# Altium PCB etapa_1_v2.PcbDoc (part 2 of 2)
Units mil, origin at the board's own origin, x right, y up, seen from the top; angles counter-clockwise.
Board outline 2047.24 x 2047.24 mil, 6 copper layers (Top Layer, Pot_Gnd, X, Y, Ground, Bottom Layer); 286 components, 155 nets, 796 pads, 177 vias.
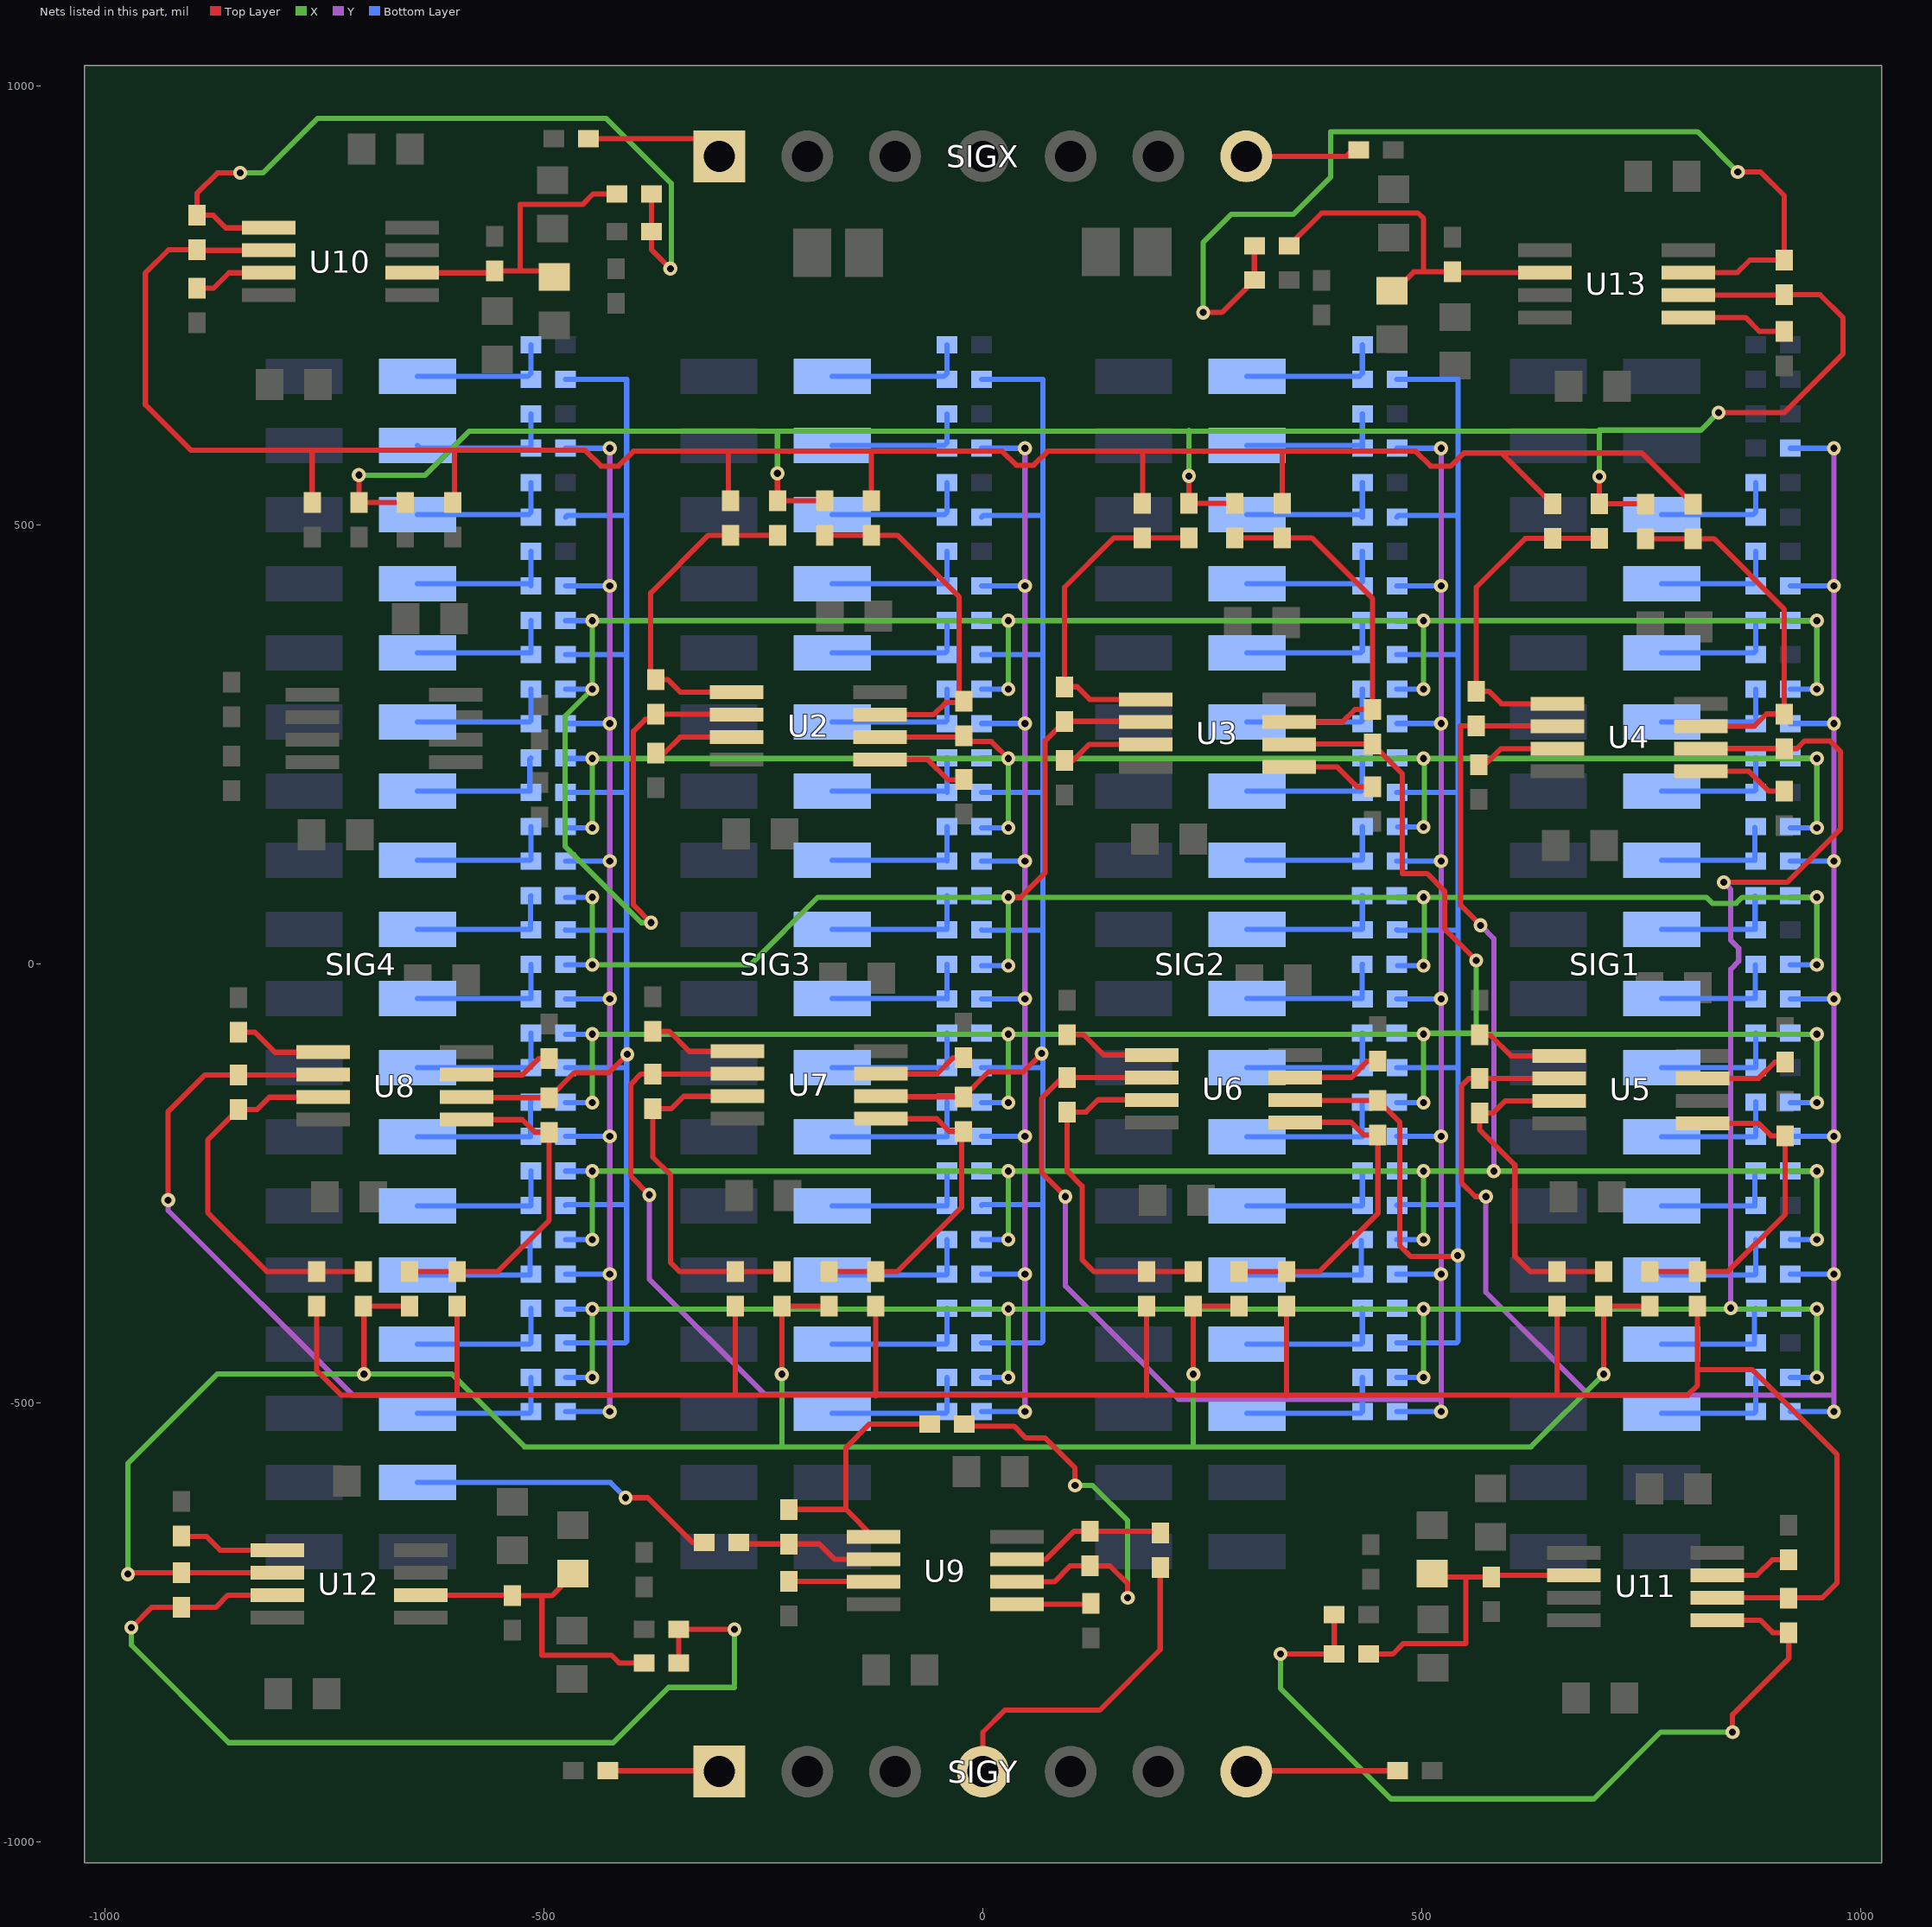
[diagram p6: the nets of this part, all layers, seen from the top]

## Via types
v1: diameter 16, hole 8, Top Layer to Bottom Layer, 177 vias

## Nets (pads, with @x,y where several pads share a name; then routed paths per layer and width w, separated by ;. In a path a pad name is that pad's centre, name@x,y a point inside that pad or via, vN(x,y) a via of type N, cw(c..) or ccw(c..) an arc to the next point about the centre after c; other vN are vias at no path point) (continued)
NetR2y_1: R2y.1 R10.1 R10y.1 R18y.1 R26y.1 R34y.1 R42y.1 R50y.1 R58y.1 U5.6 | length 2298
  Top Layer w6: R10.1@560,-130.31 553.69,-130.31 545.16,-138.84 545.16,-249.16 561,-265 v1(573,-265) ; R10.1@561,-130.31 R10.1@566,-130.31 656.2,-130.31 U5.6@656.31,-130.2
  Y w6: v1(573,-265) 573,-374 690,-491 968.58,-491 ; v1@968.58,-509.95 v1(969.58,-510) 969.58,-491 ; v1@968.58,-353.24 v1(969.58,-353.23) ; v1@968.58,-196.45 v1(969.58,-196.45) ; v1@968.58,-39.68 v1(969.58,-39.68) ; v1@968.58,117.1 v1(969.58,117.1) ; v1@968.58,273.87 v1(969.58,273.87) ; v1@968.58,430.64 v1(969.58,430.64) ; v1@968.58,587.42 v1(969.58,587.42) v1(969.58,430.64) ; 969.58,-489 v1(969.58,-353.23) ; v1(969.58,-353.23) v1(969.58,-196.45) ; v1(969.58,-196.45) v1(969.58,-39.68) ; v1(969.58,-39.68) v1(969.58,117.1) ; v1(969.58,117.1) v1(969.58,273.87) ; v1(969.58,273.87) v1(969.58,430.64)
  Bottom Layer w6: R58y.1@919.69,-510 v1@967.58,-510 ; R50y.1@919.69,-353.23 v1@967.58,-353.23 ; R42y.1@919.69,-196.45 v1@967.58,-196.45 ; R34y.1@919.69,-39.68 v1@967.58,-39.68 ; R26y.1@919.69,117.1 v1@967.58,117.1 ; R18y.1@919.69,273.87 v1@967.58,273.87 ; R10y.1@919.69,430.64 v1@967.58,430.64 ; R2y.1@919.69,587.42 v1@967.58,587.42
NetR3_0_2: R3_0.2 U2.3 | length 100
  Top Layer w6: R3_0.2@-373,239.68 -363.32,239.68 -344.8,258.2 U2.3@-280.69,258.2
NetR3_1: R3.1 R17x.1 R18x.1 R19x.1 R20x.1 R21x.1 R22x.1 R23x.1 R24x.1 U2.2 | length 2617.1
  Top Layer w6: v1(-378,47) -398,67 -398,265 -384.69,278.31 R3.1@-378,278.31 ; R3.1@-373,284.31 -281.21,284.31 U2.2@-280.69,283.8
  X w6: v1@-380.65,47 -389,47 -476,134 -476,282 v1(-445,313) v1(-445,391) v1(29,391) ; v1(29,313) v1(29,391) ; v1(502,313) v1(502,391) ; v1(950,313) v1(950,391) v1(502,391) ; v1(29,391) v1(502,391)
  Bottom Layer w6: R24x.1@-475.31,313.06 v1(-445,313) ; R23x.1@-475.31,391 v1(-445,391) ; R22x.1@-1.31,313.06 v1(29,313) ; R21x.1@-1.31,391 v1(29,391) ; R20x.1@471.69,313.06 v1(502,313) ; R19x.1@471.69,391 v1(502,391) ; R18x.1@919.68,313.06 v1(950,313) ; R17x.1@919.68,391 v1(950,391)
NetR3_2: R3.2 RX3A.2 RX3B.2 U2.1 | length 375.1
  Top Layer w6: R3.2@-378.31,317.3 -378.31,422.69 -312.69,488.31 RX3A.2@-287.2,488.31 RX3B.2@-234,488.31 ; R3.2@-373,323.69 -358.69,323.69 -344.39,309.39 U2.1@-280.69,309.39
NetR3x_2: R3x.2 R3y.2 SIG2.1 | length 165.3
  Bottom Layer w6: SIG2.1@300.72,669.29 428.83,669.29 432.31,672.78 R3x.2@432.31,705
NetR3y_1: R3y.1 R11.1 R11y.1 R19y.1 R27y.1 R35y.1 R43y.1 R51y.1 R59y.1 U6.2 | length 1987.3
  Top Layer w6: U6.2@355.69,-154.8 356.21,-155.31 R11.1@448,-155.31 ; R11.1@450,-155.31 475,-180.31 475,-321 487,-333 540,-333 v1(541,-332)
  Bottom Layer w6: R59y.1@471.69,-431.61 539.39,-431.61 541.2,-429.8 541.2,38.52 ; R51y.1@471.69,-274.84 472.46,-274.07 539.94,-274.07 ; R43y.1@471.69,-118.07 539.94,-118.07 ; R35y.1@471.69,38.71 471.88,38.52 541.2,38.52 ; R27y.1@471.69,195.48 538.48,195.48 ; R19y.1@471.69,352.26 540.26,352.26 ; R11y.1@471.69,509.03 473.46,510.8 541.2,510.8 ; R3y.1@471.69,665.8 541.2,665.8 541.2,510.8 ; 541.2,38.52 541.2,510.8
NetR4_0_2: R4_0.2 U2.5 | length 104.9
  Top Layer w6: U2.5@-117.24,232.69 -117.31,232.61 -62.61,232.61 -39.69,209.69 R4_0.2@-22,209.69
NetR4_1: R4.1 R25x.1 R26x.1 R27x.1 R28x.1 R29x.1 R30x.1 R31x.1 R32x.1 U2.6 | length 2111.9
  Top Layer w6: U2.6@-117.31,258.2 -117.2,258.31 R4.1@-22,258.31 ; R4.1@-27,253.31 9.69,253.31 v1(29,234)
  X w6: v1(-445,155) v1(-445,234) v1(29,234) ; v1(29,155) v1(29,234) ; v1@503,156 v1@503,234 ; v1(950,155) v1(950,234) v1@503,234 ; v1(29,234) v1(502,234) v1@503,234
  Bottom Layer w6: R32x.1@-475.31,155 v1(-445,155) ; R31x.1@-475.31,234 v1(-445,234) ; R30x.1@-1.31,155 v1(29,155) ; R29x.1@-1.31,234 v1(29,234) ; R28x.1@472.68,156 v1(502,156) v1@503,156 ; R27x.1@472.68,234 v1(502,234) v1@503,234 ; R26x.1@919.68,155 v1(950,155) ; R25x.1@919.68,234 v1(950,234)
NetR4_2: R4.2 RX4A.2 RX4B.2 U2.7 | length 408.5
  Top Layer w6: RX4B.2@-180,488.31 RX4A.2@-127,488.31 -97.31,488.31 -27,418 R4.2@-27,297.69 ; U2.7@-117.31,283.8 -56.2,283.8 -42.31,297.69 R4.2@-27,297.69 ; R4.2@-27,292.69 R4.2@-27,297.69 ; R4.2@-22,297.69 R4.2@-27,297.69
NetR4x_2: R4x.2 R4y.2 SIG2.3 | length 172.1
  Bottom Layer w6: SIG2.3@300.72,590.55 429.18,590.55 R4y.2@432.31,587.42 R4x.2@432.31,626.61
NetR4y_1: R4y.1 R12.1 R12y.1 R20y.1 R28y.1 R36y.1 R44y.1 R52y.1 R60y.1 U6.6 | length 2313.5
  Top Layer w6: v1(94,-265) 67,-238 67,-153 90.69,-129.31 R12.1@96,-129.31 ; R12.1@97,-129.31 192.2,-129.31 U6.6@192.31,-129.2
  Y w6: v1@94,-272 94,-367 223,-496 518,-496 ; v1@521.59,-510 v1(522,-510) v1(522,-353.23) v1@521.59,-353.23 ; v1@521.59,-196.45 v1(522,-196.45) ; v1@521.59,-39.68 v1(522,-39.68) v1(522,-196.45) ; v1@521.59,117.1 v1(522,117.1) ; v1@521.59,273.87 v1(522,273.87) ; v1@521.59,430.64 v1(522,430.64) ; v1@521.65,116.95 v1(522,117.1) ; v1(522,-353.23) v1(522,-196.45) ; v1(522,-39.68) v1@522,116.95 ; v1(522,587.42) v1(522,430.64) ; v1(522,117.1) v1(522,273.87) ; v1(522,273.87) v1(522,430.64)
  Bottom Layer w6: R60y.1@471.69,-510 v1@519.59,-510 ; R52y.1@471.69,-353.23 v1@519.59,-353.23 ; R44y.1@471.69,-196.45 v1@519.59,-196.45 ; R36y.1@471.69,-39.68 v1@519.59,-39.68 ; R28y.1@471.69,117.1 v1@519.59,117.1 ; R20y.1@471.69,273.87 v1@519.59,273.87 ; R12y.1@471.69,430.64 v1@519.59,430.64 ; R4y.1@471.69,587.42 v1@519.59,587.42
NetR5_0_2: R5_0.2 U3.3 | length 100
  Top Layer w6: R5_0.2@93,231.69 102.68,231.68 121.2,250.2 U3.3@185.31,250.2
NetR5_1: R5.1 R33x.1 R34x.1 R35x.1 R36x.1 R37x.1 R38x.1 R39x.1 R40x.1 U3.2 | length 2312.8
  Top Layer w6: v1(29,76) 43,76 71,104 71,254.31 R5.1@93,276.31 184.79,276.31 U3.2@185.31,275.8
  X w6: v1(-445,76) v1(-445,-1) -265,-1 -188,76 v1(29,76) ; v1(29,-2) v1(29,76) ; v1@503,-2 v1@503,76 ; v1(950,-1) v1(950,76) 865,76 858,69 831,69 824,76 v1@503,76 ; v1(29,76) v1(502,76) v1@503,76
  Bottom Layer w6: R40x.1@-475.31,-1 v1(-445,-1) ; R39x.1@-475.31,76 v1(-445,76) ; R38x.1@-1.32,-2 v1(29,-2) ; R37x.1@-1.32,76 v1(29,76) ; R36x.1@472.68,-2 v1(502,-2) v1@503,-2 ; R35x.1@472.68,76 v1(502,76) v1@503,76 ; R34x.1@919.68,-1 v1(950,-1) ; R33x.1@919.68,76 v1(950,76)
NetR5_2: R5.2 RX5A.2 RX5B.2 U3.1 | length 376.7
  Top Layer w6: U3.1@185.31,301.39 121.61,301.39 107.31,315.69 R5.2@93,315.69 93,429 149.31,485.31 RX5A.2@181.6,485.31 RX5B.2@234.8,485.31
NetR5x_2: R5x.2 R5y.2 SIG3.1 | length 164.7
  Bottom Layer w6: SIG3.1@-171.72,669.29 -44.17,669.29 -40.68,672.78 R5x.2@-40.68,705
NetR5y_1: R5y.1 R13.1 R13y.1 R21y.1 R29y.1 R37y.1 R45y.1 R53y.1 R61y.1 U7.2 | length 1849.3
  Top Layer w6: U7.2@-116.31,-150.8 -115.79,-151.31 R13.1@-24,-151.31 ; R13.1@-22,-151.31 6.31,-123 46,-123 v1(67,-102)
  Bottom Layer w6: R61y.1@-1.31,-431.61 66.39,-431.61 68.2,-429.8 68.2,38.52 ; R53y.1@-1.31,-274.84 -0.54,-274.07 66.94,-274.07 ; R45y.1@-1.31,-118.07 66.94,-118.07 ; R37y.1@-1.31,38.71 -1.12,38.52 68.2,38.52 ; R29y.1@-1.31,195.48 65.48,195.48 ; R21y.1@-1.31,352.26 67.26,352.26 ; R13y.1@-1.31,509.03 0.46,510.8 68.2,510.8 ; R5y.1@-1.31,665.8 68.2,665.8 68.2,510.8 ; 68.2,38.52 68.2,510.8
NetR6_0_2: R6_0.2 U3.5 | length 104.9
  Top Layer w6: U3.5@348.76,224.69 U3.5@348.69,224.61 403.39,224.61 426.31,201.69 R6_0.2@444,201.69
NetR6_1: R6.1 R41x.1 R42x.1 R43x.1 R44x.1 R45x.1 R46x.1 R47x.1 R48x.1 U3.6 | length 2441.3
  Top Layer w6: U3.6@348.69,250.2 348.8,250.31 R6.1@444,250.31 478,216.31 478,103 506,103 526,83 526,40 v1(562,4)
  X w6: v1(-445,-158) v1(-445,-80) v1(29,-80) ; v1(29,-158) v1(29,-80) ; v1(502,-158) v1(502,-80) ; v1(562,4) 562,-80 ; v1(950,-158) v1(950,-80) 562,-80 ; v1(29,-80) v1(502,-80) ; v1(502,-80) 503,-79 561,-79 562,-80
  Bottom Layer w6: R48x.1@-475.31,-158 v1(-445,-158) ; R47x.1@-475.31,-80 v1(-445,-80) ; R46x.1@-1.31,-158 v1(29,-158) ; R45x.1@-1.31,-80 v1(29,-80) ; R44x.1@471.69,-158 v1(502,-158) ; R43x.1@471.69,-80 v1(502,-80) ; R42x.1@919.68,-158 v1(950,-158) ; R41x.1@919.68,-80 v1(950,-80)
NetR6_2: R6.2 RX6A.2 RX6B.2 U3.7 | length 413.1
  Top Layer w6: RX6B.2@287,485.31 RX6A.2@341,485.31 374.69,485.31 444,416 R6.2@444,289.69 423.69,289.69 409.8,275.8 U3.7@348.69,275.8
NetR6x_2: R6x.2 R6y.2 SIG3.3 | length 165.3
  Bottom Layer w6: SIG3.3@-171.72,590.55 -43.82,590.55 -40.68,593.69 R6x.2@-40.68,626.61
NetR6y_1: R6y.1 R14.1 R14y.1 R22y.1 R30y.1 R38y.1 R46y.1 R54y.1 R62y.1 U7.6 | length 2315.8
  Top Layer w6: v1(-380,-263) -401,-242 -401,-137 -389.31,-125.31 R14.1@-376,-125.31 ; R14.1@-375,-125.31 -279.8,-125.31 U7.6@-279.69,-125.2
  Y w6: v1(-380,-263) -380,-359 -249,-490 45,-490 ; v1(48,-510) v1(48,-353.23) v1(48,-196.45) v1(48,-39.68) v1(48,117.1) v1(48,273.87) v1(48,430.64) v1(48,587.42)
  Bottom Layer w6: R62y.1@-1.31,-510 v1@46.59,-510 ; R54y.1@-1.31,-353.23 v1@46.59,-353.23 ; R46y.1@-1.31,-196.45 v1@46.59,-196.45 ; R38y.1@-1.31,-39.68 v1@46.59,-39.68 ; R30y.1@-1.31,117.1 v1@46.59,117.1 ; R22y.1@-1.31,273.87 v1@46.59,273.87 ; R14y.1@-1.31,430.64 v1@46.59,430.64 ; R6y.1@-1.31,587.42 v1@46.59,587.42
NetR7_0_2: R7_0.2 U4.3 | length 100
  Top Layer w6: R7_0.2@562,226.68 571.68,226.68 590.2,245.2 U4.3@654.31,245.2
NetR7_1: R7.1 R49x.1 R50x.1 R51x.1 R52x.1 R53x.1 R54x.1 R55x.1 R56x.1 U4.2 | length 2583.1
  Top Layer w6: v1(567,44) 544,67 544,271.31 R7.1@562,271.31 653.79,271.31 U4.2@654.31,270.8
  Y w6: v1(567,44) 582,29 v1(582,-236)
  X w6: v1(-445,-314) v1(-445,-236) v1(29,-236) ; v1(29,-314) v1(29,-236) ; v1(502,-314) v1(502,-236) ; v1(950,-314) v1(950,-236) v1(502,-236) ; v1(29,-236) v1(502,-236)
  Bottom Layer w6: R56x.1@-475.31,-314 v1(-445,-314) ; R55x.1@-475.31,-236 v1(-445,-236) ; R54x.1@-1.31,-314 v1(29,-314) ; R53x.1@-1.31,-236 v1(29,-236) ; R52x.1@471.69,-314 v1(502,-314) ; R51x.1@471.69,-236 v1(502,-236) ; R50x.1@919.68,-314 v1(950,-314) ; R49x.1@919.68,-236 v1(950,-236)
NetR7_2: R7.2 RX7A.2 RX7B.2 U4.1 | length 379.8
  Top Layer w6: U4.1@654.31,296.39 590.61,296.39 576.31,310.69 R7.2@562,310.69 562,429 617.63,484.63 RX7A.2@649,484.63 RX7B.2@702.2,484.63
NetR7x_2: R7x.2 R7y.2 SIG4.1 | length 163.1
  Bottom Layer w6: SIG4.1@-644.16,669.29 -518.17,669.29 -514.69,672.78 R7x.2@-514.69,705
NetR7y_1: R7y.1 R15.1 R15y.1 R23y.1 R31y.1 R39y.1 R47y.1 R55y.1 R63y.1 U8.2 | length 1849.3
  Top Layer w6: U8.2@-588.31,-151.8 -587.79,-152.31 R15.1@-496,-152.31 ; R15.1@-494,-152.31 -465.69,-124 -426,-124 v1(-405,-103)
  Bottom Layer w6: R63y.1@-475.31,-431.61 -407.61,-431.61 -405.8,-429.81 -405.8,38.52 ; R55y.1@-475.31,-274.84 -474.54,-274.07 -407.06,-274.07 ; R47y.1@-475.31,-118.07 -407.06,-118.07 ; R39y.1@-475.31,38.71 -475.12,38.52 -405.8,38.52 ; R31y.1@-475.31,195.48 -408.52,195.48 ; R23y.1@-475.31,352.26 -406.74,352.26 ; R15y.1@-475.31,509.03 -473.54,510.8 -405.8,510.8 ; R7y.1@-475.31,665.8 -405.8,665.8 -405.8,510.8 ; -405.8,38.52 -405.8,510.8
NetR8_0_2: R8_0.2 U4.5 | length 104.9
  Top Layer w6: U4.5@817.76,219.69 U4.5@817.69,219.61 872.39,219.61 895.31,196.69 R8_0.2@913,196.69
NetR8_1: R8.1 R57x.1 R58x.1 R59x.1 R60x.1 R61x.1 R62x.1 R63x.1 R64x.1 U4.6 | length 2861.5
  Top Layer w6: U4.6@817.69,245.2 817.8,245.31 R8.1@913,245.31 927.31,245.31 936,254 965,254 977,242 977,154 916,93 v1(844,93)
  Y w6: v1(844,93) 852,85 852,27 861,18 861,3 852,-6 v1(852,-392) v1@852,-394
  X w6: v1(-445,-471) v1(-445,-393) v1(29,-393) ; v1(29,-471) v1(29,-393) ; v1(502,-471) v1(502,-393) ; v1(950,-471) v1(950,-393) v1(502,-393) ; v1(29,-393) v1(502,-393)
  Bottom Layer w6: R64x.1@-475.31,-471 v1(-445,-471) ; R63x.1@-475.31,-393 v1(-445,-393) ; R62x.1@-1.31,-471 v1(29,-471) ; R61x.1@-1.31,-393 v1(29,-393) ; R60x.1@471.69,-471 v1(502,-471) ; R59x.1@471.69,-393 v1(502,-393) ; R58x.1@919.68,-471 v1(950,-471) ; R57x.1@919.68,-393 v1(950,-393)
NetR8_2: R8.2 RX8A.2 RX8B.2 U4.7 | length 411.6
  Top Layer w6: RX8B.2@755,484.31 RX8A.2@809,484.31 832.69,484.31 913,404 R8.2@913,284.69 892.69,284.69 878.8,270.8 U4.7@817.69,270.8
NetR8x_2: R8x.2 R8y.2 SIG4.3 | length 170
  Bottom Layer w6: SIG4.3@-644.16,590.55 -641.03,587.42 R8y.2@-514.69,587.42 R8x.2@-514.69,626.61
NetR8y_1: R8y.1 R16.1 R16y.1 R24y.1 R32y.1 R40y.1 R48y.1 R56y.1 R64y.1 U8.6 | length 2382.1
  Top Layer w6: v1(-928,-269) -928,-168 -886.31,-126.31 R16.1@-848,-126.31 ; R16.1@-847,-126.31 -751.8,-126.31 U8.6@-751.69,-126.2
  Y w6: v1(-928,-269) -928,-281 -718,-491 -429,-491 ; v1@-426.41,-353.24 v1(-425,-353.23) ; v1@-426.41,-196.47 v1(-425,-196.45) ; v1@-426.41,-39.69 v1(-425,-39.68) ; v1@-426.41,117.08 v1(-425,117.1) ; v1@-426.41,273.86 v1(-425,273.87) ; v1@-426.41,430.63 v1(-425,430.64) ; v1@-426.41,587.4 v1(-425,587.42) v1(-425,430.64) ; v1(-425,-510) v1(-425,-353.23) ; v1(-425,-353.23) v1(-425,-196.45) ; v1(-425,-196.45) v1(-425,-39.68) ; v1(-425,-39.68) v1(-425,117.1) ; v1(-425,117.1) v1(-425,273.87) ; v1(-425,273.87) v1(-425,430.64)
  Bottom Layer w6: R64y.1@-475.31,-510 v1@-427.41,-510 ; R56y.1@-475.31,-353.23 v1@-427.41,-353.23 ; R48y.1@-475.31,-196.45 v1@-427.41,-196.45 ; R40y.1@-475.31,-39.68 v1@-427.41,-39.68 ; R32y.1@-475.31,117.1 v1@-427.41,117.1 ; R24y.1@-475.31,273.87 v1@-427.41,273.87 ; R16y.1@-475.31,430.64 v1@-427.41,430.64 ; R8y.1@-475.31,587.42 v1@-427.41,587.42
NetR9_0_2: R9_0.2 U5.3 | length 100
  Top Layer w6: U5.3@819.69,-130.2 883.8,-130.2 902.32,-111.68 R9_0.2@912,-111.68
NetR9_2: R9.2 RY1A.2 RY1B.2 U5.1 | length 368.6
  Top Layer w6: RY1B.2@760,-350.31 RY1A.2@814,-350.31 848.69,-350.31 914,-285 R9.2@914,-195.69 ; U5.1@819.69,-181.39 883.39,-181.39 897.69,-195.69 R9.2@912,-195.69
NetR9x_2: R9x.2 R9y.2 SIG1.5 | length 141.9
  Bottom Layer w6: SIG1.5@773.16,511.81 877.53,511.81 880.31,514.59 R9x.2@880.31,548.22
NetR10_0_2: R10_0.2 U5.5 | length 104.9
  Top Layer w6: R10_0.2@561,-81.69 578.69,-81.69 601.61,-104.61 U5.5@656.31,-104.61 U5.5@656.24,-104.69
NetR10_2: R10.2 RY2A.2 RY2B.2 U5.7 | length 389.3
  Top Layer w6: R10.2@561,-169.69 R10.2@566,-169.69 ; U5.7@656.31,-155.8 595.2,-155.8 581.31,-169.69 R10.2@566,-169.69 ; RY2B.2@707.2,-350.31 RY2A.2@654,-350.31 623.31,-350.31 606,-333 606,-229 566,-189 R10.2@566,-169.69
NetR10x_2: R10x.2 R10y.2 SIG1.7 | length 142.5
  Bottom Layer w6: SIG1.7@773.16,433.07 877.89,433.07 880.31,435.5 R10x.2@880.31,469.84
NetR11_0_2: R11_0.2 U6.3 | length 100
  Top Layer w6: U6.3@355.69,-129.2 419.8,-129.2 438.32,-110.68 R11_0.2@448,-110.68
NetR11_2: R11.2 RY3A.2 RY3B.2 U6.1 | length 373
  Top Layer w6: RY3B.2@292,-350.31 RY3A.2@346,-350.31 383.69,-350.31 450,-284 R11.2@450,-194.69 ; U6.1@355.69,-180.39 419.39,-180.39 433.69,-194.69 R11.2@448,-194.69
NetR11x_2: R11x.2 R11y.2 SIG2.5 | length 171.9
  Bottom Layer w6: SIG2.5@300.72,511.81 429.53,511.81 R11y.2@432.31,509.03 R11x.2@432.31,548.22
NetR12_0_2: R12_0.2 U6.5 | length 104.9
  Top Layer w6: R12_0.2@97,-80.69 114.69,-80.69 137.61,-103.61 U6.5@192.31,-103.61 U6.5@192.24,-103.69
NetR12_2: R12.2 RY4A.2 RY4B.2 U6.7 | length 408.7
  Top Layer w6: R12.2@96,-168.69 96,-236 113,-253 113,-337 126.31,-350.31 RY4A.2@186.6,-350.31 RY4B.2@239.8,-350.31 ; R12.2@97,-168.69 117.31,-168.69 131.2,-154.8 U6.7@192.31,-154.8
NetR12x_2: R12x.2 R12y.2 SIG2.7 | length 166.9
  Bottom Layer w6: SIG2.7@300.72,433.07 429.89,433.07 432.31,435.5 R12x.2@432.31,469.84
NetR13_0_2: R13_0.2 U7.3 | length 100
  Top Layer w6: U7.3@-116.31,-125.2 -52.2,-125.2 -33.68,-106.68 R13_0.2@-24,-106.68
NetR13_2: R13.2 RY5A.2 RY5B.2 U7.1 | length 365.9
  Top Layer w6: RY5B.2@-175,-350.31 RY5A.2@-122,-350.31 -97.31,-350.31 -24,-277 -24,-190.69 -38.31,-190.69 -52.61,-176.39 U7.1@-116.31,-176.39
NetR13x_2: R13x.2 R13y.2 SIG3.5 | length 165.8
  Bottom Layer w6: SIG3.5@-171.72,511.81 -43.46,511.81 -40.68,514.59 R13x.2@-40.68,548.23
NetR14_0_2: R14_0.2 U7.5 | length 104.9
  Top Layer w6: R14_0.2@-375,-76.69 -357.31,-76.69 -334.39,-99.61 U7.5@-279.69,-99.61 U7.5@-279.76,-99.69
NetR14_2: R14.2 RY6A.2 RY6B.2 U7.7 | length 415.9
  Top Layer w6: R14.2@-376,-164.69 -376,-220 -356,-240 -356,-340 -345.69,-350.31 RY6A.2@-282.2,-350.31 RY6B.2@-229,-350.31 ; R14.2@-375,-164.69 -354.69,-164.69 -340.8,-150.8 U7.7@-279.69,-150.8
NetR14x_2: R14x.2 R14y.2 SIG3.7 | length 166.4
  Bottom Layer w6: SIG3.7@-171.72,433.07 -43.11,433.07 -40.68,435.5 R14x.2@-40.68,469.84
NetR15_0_2: R15_0.2 U8.3 | length 100
  Top Layer w6: U8.3@-588.31,-126.2 -524.2,-126.2 -505.68,-107.68 R15_0.2@-496,-107.68
NetR15_2: R15.2 RY7A.2 RY7B.2 U8.1 | length 381.7
  Top Layer w6: RY7B.2@-653,-350.31 RY7A.2@-599,-350.31 -552.31,-350.31 -494,-292 R15.2@-494,-191.69 ; U8.1@-588.31,-177.39 -524.61,-177.39 -510.31,-191.69 R15.2@-496,-191.69
NetR15x_2: R15x.2 R15y.2 SIG4.5 | length 164.3
  Bottom Layer w6: SIG4.5@-644.16,511.81 -517.47,511.81 -514.69,514.59 R15x.2@-514.69,548.23
NetR16_0_2: R16_0.2 U8.5 | length 104.9
  Top Layer w6: R16_0.2@-847,-77.69 -829.31,-77.69 -806.39,-100.61 U8.5@-751.69,-100.61 U8.5@-751.76,-100.69
NetR16_2: R16.2 RY8A.2 RY8B.2 U8.7 | length 438
  Top Layer w6: R16.2@-848,-165.69 -883,-200.69 -883,-283 -815.69,-350.31 RY8A.2@-759,-350.31 RY8B.2@-705.8,-350.31 ; R16.2@-847,-165.69 -826.69,-165.69 -812.8,-151.8 U8.7@-751.69,-151.8
NetR16x_2: R16x.2 R16y.2 SIG4.7 | length 169.7
  Bottom Layer w6: SIG4.7@-644.16,433.07 -517.11,433.07 R16y.2@-514.69,435.5 ; R16y.2@-514.69,430.64 R16x.2@-514.69,469.84
NetR17_1: R17.1 R18.1 U9.2 | length 163.6
  Top Layer w6: R17.1@-281.04,-660.69 R18.1@-221,-660.69 -186.31,-660.69 -168.8,-678.2 U9.2@-124.69,-678.2
NetR17_2: R17.2 SIG4.33 | length 354.8
  Top Layer w6: v1(-407,-608) -381.7,-608 -330.7,-659 R17.2@-317.69,-659
  Bottom Layer w6: SIG4.33@-644.16,-590.55 -424.45,-590.55 v1(-407,-608)
NetR17x_2: R17x.2 R17y.2 SIG1.9 | length 143.1
  Bottom Layer w6: SIG1.9@773.16,354.33 878.24,354.33 880.31,356.4 R17x.2@880.31,391.45
NetR18_0_2: R18_0.2 U9.3 | length 96.5
  Top Layer w6: R18_0.2@-221,-703.31 -125.17,-703.31 U9.3@-124.69,-703.8
NetR18_2: R18.2 R19.1 U9.1 | length 286.1
  Top Layer w6: R18.2@-221,-621.31 -155.99,-621.31 ; U9.1@-124.69,-652.61 -155.99,-621.31 ; R19.1@-60.68,-524 -129,-524 -155.99,-550.99 -155.99,-621.31
NetR18x_2: R18x.2 R18y.2 SIG1.11 | length 143.6
  Bottom Layer w6: SIG1.11@773.16,275.59 878.59,275.59 880.31,277.31 R18x.2@880.31,313.06
NetR19_2: R19.2 R20.1 U9.6 | length 489.8
  Top Layer w6: R19.2@-21.31,-524 -18.81,-526.5 35.5,-526.5 49,-540 71,-540 105,-574 v1(105,-594) ; U9.6@38.69,-703.8 81.2,-703.8 99.31,-685.69 R20.1@122,-685.69 144.69,-685.69 165,-706 v1(165,-722)
  X w6: v1(105,-594) 125,-594 165,-634 v1(165,-722)
NetR19x_2: R19x.2 R19y.2 SIG2.9 | length 167.5
  Bottom Layer w6: SIG2.9@300.72,354.33 430.24,354.33 432.31,356.4 R19x.2@432.31,391.45
NetR20_0_2: R20_0.2 U9.5 | length 84.8
  Top Layer w6: U9.5@38.69,-729.39 121.93,-729.39 R20_0.2@123,-728.31
NetR20_2: R20.2 RDYN.2 U9.7 | length 177.3
  Top Layer w6: U9.7@38.69,-678.2 71.8,-678.2 103.69,-646.31 R20.2@122,-646.31 200,-646.31 RDYN.2@202,-648.31
NetR20x_2: R20x.2 R20y.2 SIG2.11 | length 168.1
  Bottom Layer w6: SIG2.11@300.72,275.59 430.59,275.59 432.31,277.31 R20x.2@432.31,313.06
NetR21_1: R21.1 R23.1 R24.2 U10.6 | length 356.1
  Top Layer w6: U10.6@-650.31,787.2 -558.11,787.2 R24.2@-556,789.31 -527,789.31 ; R21.1@-488,784.53 -492.79,789.31 -527,789.31 ; R23.1@-416.68,877 -444,877 -456,865 -527,865 -527,789.31
NetR21x_2: R21x.2 R21y.2 SIG3.9 | length 167.1
  Bottom Layer w6: SIG3.9@-171.72,354.33 -171.55,354.5 -68.17,354.5 -68,354.33 -42.76,354.33 -40.68,356.4 R21x.2@-40.68,391.45
NetR22_1: R22.1 R23.2 R25.2 U10.1 | length 910.5
  Top Layer w6: v1(-846,901) -872,901 -895,878 R22.1@-895,852.68 -876.68,852.68 -862.39,838.39 U10.1@-813.69,838.39 ; R25.2@-379.31,834 -377.31,836 R23.2@-377.31,877 ; R25.2@-377.31,834 -377.31,813.31 v1(-356,792)
  X w6: v1(-846,901) -820,901 -758,963 -429,963 -355,889 -355,793 v1(-356,792)
NetR22_2: R22.2 RX1A.1 RX2A.1 RX3A.1 RX4A.1 RX5A.1 RX6A.1 RX7A.1 RX8A.1 U10.2 | length 2583.2
  Top Layer w6: U10.2@-813.69,812.8 -894.48,812.8 R22.2@-895,813.31 -927.69,813.31 -954,787 -954,637 -902,585 -764,585 ; RX1A.1@-764,525.68 -764,585 ; RX2A.1@-602,527.68 -602,585 ; RX3A.1@-287.2,527.68 -290,530.49 -290,584 ; RX4A.1@-127,527.68 -127,583 -128,584 ; RX5A.1@181.6,524.68 182,525.08 182,584 ; RX6A.1@341,524.68 341,583 340,584 ; RX7A.1@649,524 591,582 ; RX8A.1@809,523.68 750.69,582 591,582 ; -764,585 -602,585 ; -602,585 -453,585 -435,567 -415,567 -398,584 -290,584 ; -290,584 -128,584 ; -128,584 22,584 38,568 58,568 74,584 182,584 ; 182,584 340,584 ; 340,584 493,584 510,567 533,567 548,582 591,582
NetR22x_2: R22x.2 R22y.2 SIG3.11 | length 167.5
  Bottom Layer w6: SIG3.11@-171.72,275.59 -42.4,275.59 -40.68,277.31 R22x.2@-40.68,313.06
NetR23_0_1: R23_0.1 U10.3 | length 88.6
  Top Layer w6: R23_0.1@-895,769.68 -876.32,769.68 -858.8,787.2 U10.3@-813.69,787.2
NetR23x_2: R23x.2 R23y.2 SIG4.9 | length 166.6
  Bottom Layer w6: SIG4.9@-644.16,354.33 -514.69,354.33 R23x.2@-514.69,391.45
NetR24x_2: R24x.2 R24y.2 SIG4.11 | length 165.9
  Bottom Layer w6: SIG4.11@-644.16,275.59 -516.4,275.59 -514.69,277.31 R24x.2@-514.69,313.06
NetR25x_2: R25x.2 R25y.2 SIG1.13 | length 144.2
  Bottom Layer w6: SIG1.13@773.16,196.85 878.95,196.85 880.31,198.22 R25x.2@880.31,234.68
NetR26x_2: R26x.2 R26y.2 SIG1.15 | length 143.3
  Bottom Layer w6: SIG1.15@773.16,118.11 879.3,118.11 R26x.2@879.3,155.28
NetR27_1: R27.1 R29.1 R30.2 U13.2 | length 411.2
  Top Layer w6: R29.1@348.68,818 386,855.32 495.68,855.32 502,849 502,791 ; R27.1@468,765.53 490.79,788.31 R30.2@535,788.31 535.77,787.54 U13.2@640.06,787.54
NetR27x_2: R27x.2 R27y.2 SIG2.13 | length 168.6
  Bottom Layer w6: SIG2.13@300.72,196.85 430.95,196.85 432.31,198.22 R27x.2@432.31,234.68
NetR28_0_1: R28_0.1 U13.5 | length 116.1
  Top Layer w6: U13.5@803.44,736.36 868.64,736.36 884.32,720.68 R28_0.1@913,720.68
NetR28_1: R28.1 R29.2 R31.2 U13.7 | length 1156.3
  Top Layer w6: v1(251,742) 272.32,742 R31.2@309.31,779 R29.2@309.31,818 ; U13.7@803.44,787.54 859.54,787.54 873.68,801.68 R28.1@913,801.68 913,875 886,902 v1(860,902)
  X w6: v1(251,742) 251,822 283,854 354,854 396,896 396,948 814,948 v1(860,902)
NetR28_2: R28.2 RX1B.1 RX2B.1 RX3B.1 RX4B.1 RX5B.1 RX6B.1 RX7B.1 RX8B.1 U13.6 | length 2464.3
  Top Layer w6: v1(-710.8,556.8) RX1B.1@-710.8,525.68 RX2B.1@-658,525.68 ; v1(-234,558.8) RX3B.1@-234,527.68 RX4B.1@-180,527.68 ; v1(234.8,555.8) RX5B.1@234.8,524.68 RX6B.1@287,524.68 ; v1(702.2,555.11) RX7B.1@702.2,524 RX8B.1@754.69,524 ; U13.6@803.44,761.95 912.64,761.95 R28.2@913,762.31 953.69,762.31 980,736 980,695 913,628 v1(838,628)
  X w6: v1(-710.8,556.8) -635.2,556.8 -585,607 -234,607 ; v1(-234,558.8) -234,607 ; v1(234.8,555.8) 234.8,607 ; 234.8,607.8 234.8,607 ; v1(702.2,555.11) 702.2,607 234.8,607 ; 702.2,608 818,608 v1(838,628) ; -234,607 234.8,607
NetR28x_2: R28x.2 R28y.2 SIG2.15 | length 169.2
  Bottom Layer w6: SIG2.15@300.72,118.11 431.3,118.11 432.31,119.12 R28x.2@432.31,156.29
NetR29x_2: R29x.2 R29y.2 SIG3.13 | length 170.8
  Bottom Layer w6: SIG3.13@-171.72,196.85 -42.05,196.85 R29y.2@-40.68,195.48 R29x.2@-40.68,234.68
NetR30x_2: R30x.2 R30y.2 SIG3.15 | length 170.6
  Bottom Layer w6: SIG3.15@-171.72,118.11 -41.7,118.11 R30y.2@-40.68,117.1 R30x.2@-40.68,156.29
NetR31x_2: R31x.2 R31y.2 SIG4.13 | length 166.5
  Bottom Layer w6: SIG4.13@-644.16,196.85 -516.05,196.85 -516.05,233.31 R31x.2@-514.69,234.68
NetR32x_2: R32x.2 R32y.2 SIG4.15 | length 167.1
  Bottom Layer w6: SIG4.15@-644.16,118.11 -515.7,118.11 -514.69,119.12 R32x.2@-514.69,156.29
NetR33_1: R33.1 R35.1 R36.2 U11.6 | length 356.1
  Top Layer w6: R35.1@439.68,-786 467,-786 479,-774 550,-774 550,-698.31 ; R33.1@511,-693.53 515.79,-698.31 550,-698.31 ; U11.6@673.31,-696.2 581.11,-696.2 R36.2@579,-698.31 550,-698.31
NetR33x_2: R33x.2 R33y.2 SIG1.17 | length 144.4
  Bottom Layer w6: SIG1.17@773.16,39.37 879.65,39.37 R33x.2@879.65,77.24
NetR34_0_1: R34_0.1 U11.3 | length 88.6
  Top Layer w6: U11.3@836.69,-696.2 881.8,-696.2 899.32,-678.68 R34_0.1@918,-678.68
NetR34_1: R34.1 R35.2 R37.2 U11.1 | length 969.9
  Top Layer w6: v1(339,-786) R35.2@400.31,-786 400.31,-745 R37.2@402.31,-743 ; U11.1@836.69,-747.39 885.39,-747.39 899.68,-761.68 R34.1@918,-761.68 918,-791 854,-855 v1(854,-875)
  X w6: v1(339,-786) 339,-825 465,-951 696,-951 772,-875 v1(854,-875)
NetR34_2: R34.2 RY1A.1 RY2A.1 RY3A.1 RY4A.1 RY5A.1 RY6A.1 RY7A.1 RY8A.1 U11.2 | length 2852.5
  Top Layer w6: RY8A.1@-759,-389.68 -759,-463 -731,-491 -599,-491 ; RY7A.1@-599,-389.68 -599,-491 ; -282.2,-491.2 -282.2,-491 ; RY6A.1@-282.2,-389.68 -282.2,-491 ; -122,-492 -122,-491 ; RY5A.1@-122,-389.68 -122,-491 ; 186.6,-491.4 186.6,-491 ; RY4A.1@186.6,-389.68 186.6,-491 ; 346,-492 346,-491 ; RY3A.1@346,-389.68 346,-491 ; RY2A.1@654,-389.68 654,-491 ; RY1A.1@814,-389.68 814,-462 ; U11.2@836.69,-721.8 R34.2@917.48,-721.8 ; R34.2@918,-722.31 R34.2@917.48,-721.8 ; -599,-491 -282.2,-491 ; -282.2,-491 -122,-491 ; -122,-491 186.6,-491 ; 186.6,-491 346,-491 ; 346,-491 654,-491 ; 654,-491 803,-491 814,-480 814,-462 ; 814,-462 876,-462 973,-559 973,-705 956.2,-721.8 R34.2@917.48,-721.8
NetR34x_2: R34x.2 R34y.2 SIG1.19 | length 145.4
  Bottom Layer w6: SIG1.19@773.16,-39.37 880.01,-39.37 R34x.2@880.01,-0.79
NetR35x_2: R35x.2 R35y.2 SIG2.17 | length 169.7
  Bottom Layer w6: SIG2.17@300.72,39.37 431.65,39.37 432.31,40.03 R35x.2@432.31,77.9
NetR36x_2: R36x.2 R36y.2 SIG2.19 | length 170.3
  Bottom Layer w6: SIG2.19@300.72,-39.37 432,-39.37 432,-0.79 R36x.2@432.31,-0.49
NetR37x_2: R37x.2 R37y.2 SIG3.17 | length 169.2
  Bottom Layer w6: SIG3.17@-171.72,39.37 -41.34,39.37 -40.68,40.03 R37x.2@-40.68,77.9
NetR38x_2: R38x.2 R38y.2 SIG3.19 | length 170.4
  Bottom Layer w6: SIG3.19@-171.72,-39.37 -40.99,-39.37 R38y.2@-40.68,-39.68 R38x.2@-40.68,-0.49
NetR39_1: R39.1 R41.1 R42.2 U12.2 | length 366.9
  Top Layer w6: U12.2@-640.31,-718.8 -536.02,-718.8 -535.25,-719.57 -491.04,-719.57 R39.1@-468.25,-696.78 ; -502.25,-722.25 -502.25,-787.25 -423.25,-787.25 -414.25,-796.25 R41.1@-385.94,-796.25
NetR39x_2: R39x.2 R39y.2 SIG4.17 | length 167.6
  Bottom Layer w6: SIG4.17@-644.16,39.37 -515.35,39.37 -515.35,77.24 R39x.2@-514.68,77.9
NetR40_0_1: R40_0.1 U12.5 | length 116.1
  Top Layer w6: R40_0.1@-913.25,-651.94 -884.57,-651.94 -868.89,-667.61 U12.5@-803.69,-667.61
NetR40_1: R40.1 R41.2 R43.2 U12.7 | length 1126.5
  Top Layer w6: v1(-970,-756) -946.68,-732.68 R40.1@-913,-732.68 ; R40.1@-913.25,-732.94 -873.94,-732.94 -859.8,-718.8 U12.7@-803.69,-718.8 ; R41.2@-346.57,-796.25 R43.2@-346.57,-757.25 ; R43.2@-346.31,-758 v1(-283,-758)
  X w6: v1(-970,-756) -970,-776 -859,-887 -421,-887 -358,-824 -283,-824 ; -283,-821 v1(-283,-758)
NetR40_2: R40.2 RY1B.1 RY2B.1 RY3B.1 RY4B.1 RY5B.1 RY6B.1 RY7B.1 RY8B.1 U12.6 | length 2774.6
  Top Layer w6: v1(-974,-695) -972.31,-693.31 R40.2@-913,-693.31 ; R40.2@-913.25,-693.57 R40.2@-913,-693.31 ; U12.6@-803.69,-693.2 -912.89,-693.2 R40.2@-913,-693.31 ; RY8B.1@-705.8,-389.68 RY8B.1@-705,-389.68 ; v1(-705,-467.2) RY8B.1@-705,-389.68 ; RY7B.1@-653,-389.68 RY8B.1@-705,-389.68 ; v1(-229,-467.2) RY6B.1@-229,-389.68 RY5B.1@-175,-389.68 ; v1(239.8,-467.2) RY4B.1@239.8,-389.68 RY3B.1@292,-389.68 ; v1(707.2,-467.2) RY2B.1@707.2,-389.68 RY1B.1@760,-389.68
  X w6: v1(-974,-695) -974,-569 -872.2,-467.2 v1(-705,-467.2) -604.8,-467.2 -522,-550 -229,-550 v1(-229,-467.2) ; -227,-550 624.4,-550 v1(707.2,-467.2) ; 239.8,-549.8 v1(239.8,-467.2)
NetR40x_2: R40x.2 R40y.2 SIG4.19 | length 168.2
  Bottom Layer w6: SIG4.19@-644.16,-39.37 -515,-39.37 -514.68,-39.06 R40x.2@-514.68,-0.49
NetR41x_2: R41x.2 R41y.2 SIG1.21 | length 146.4
  Bottom Layer w6: SIG1.21@773.16,-118.11 880.27,-118.11 880.27,-78.92 R41x.2@880.31,-78.87
NetR42x_2: R42x.2 R42y.2 SIG1.23 | length 146.5
  Bottom Layer w6: SIG1.23@773.16,-196.85 879.92,-196.85 R42y.2@880.31,-196.45 R42x.2@880.31,-157.26
NetR43x_2: R43x.2 R43y.2 SIG2.21 | length 170.8
  Bottom Layer w6: SIG2.21@300.72,-118.11 432.27,-118.11 432.27,-78.92 R43x.2@432.31,-78.87
NetR44x_2: R44x.2 R44y.2 SIG2.23 | length 170.4
  Bottom Layer w6: SIG2.23@300.72,-196.85 431.92,-196.85 R44x.2@431.92,-157.65
NetR45x_2: R45x.2 R45y.2 SIG3.21 | length 170.2
  Bottom Layer w6: SIG3.21@-171.72,-118.11 -40.73,-118.11 -40.73,-78.92 R45x.2@-40.68,-78.87
NetR46x_2: R46x.2 R46y.2 SIG3.23 | length 170.4
  Bottom Layer w6: SIG3.23@-171.72,-196.85 -41.08,-196.85 R46y.2@-40.68,-196.45 R46x.2@-40.68,-157.26
NetR47x_2: R47x.2 R47y.2 SIG4.21 | length 168.7
  Bottom Layer w6: SIG4.21@-644.16,-118.11 -514.73,-118.11 -514.73,-78.92 R47x.2@-514.68,-78.87
NetR48x_2: R48x.2 R48y.2 SIG4.23 | length 168.8
  Bottom Layer w6: SIG4.23@-644.16,-196.85 -515.08,-196.85 -515.08,-157.66 R48x.2@-514.68,-157.26
NetR49x_2: R49x.2 R49y.2 SIG1.25 | length 145.6
  Bottom Layer w6: SIG1.25@773.16,-275.59 879.56,-275.59 R49x.2@879.56,-236.4
NetR50x_2: R50x.2 R50y.2 SIG1.27 | length 146.8
  Bottom Layer w6: SIG1.27@773.16,-354.33 879.21,-354.33 R50y.2@880.31,-353.23 R50x.2@880.31,-314.03
NetR51x_2: R51x.2 R51y.2 SIG2.25 | length 171.1
  Bottom Layer w6: SIG2.25@300.72,-275.59 431.56,-275.59 R51y.2@432.31,-274.84 R51x.2@432.31,-235.65
NetR52x_2: R52x.2 R52y.2 SIG2.27 | length 169.7
  Bottom Layer w6: SIG2.27@300.72,-354.33 431.21,-354.33 R52x.2@431.21,-315.13
NetR53x_2: R53x.2 R53y.2 SIG3.25 | length 170.5
  Bottom Layer w6: SIG3.25@-171.72,-275.59 -41.43,-275.59 R53y.2@-40.68,-274.84 R53x.2@-40.68,-235.65
NetR54x_2: R54x.2 R54y.2 SIG3.27 | length 170.7
  Bottom Layer w6: SIG3.27@-171.72,-354.33 -41.79,-354.33 R54y.2@-40.68,-353.23 R54x.2@-40.68,-314.03
NetR55x_2: R55x.2 R55y.2 SIG4.25 | length 169
  Bottom Layer w6: SIG4.25@-644.16,-275.59 -515.44,-275.59 R55y.2@-514.69,-274.84 R55x.2@-514.69,-235.65
NetR56x_2: R56x.2 R56y.2 SIG4.27 | length 169.1
  Bottom Layer w6: SIG4.27@-644.16,-354.33 -515.79,-354.33 -515.79,-315.13 R56x.2@-514.69,-314.03
NetR57x_2: R57x.2 R57y.2 SIG1.29 | length 146.9
  Bottom Layer w6: SIG1.29@773.16,-433.07 878.86,-433.07 878.86,-393.88 R57x.2@880.31,-392.42
NetR58x_2: R58x.2 R58y.2 SIG1.31 | length 147.1
  Bottom Layer w6: SIG1.31@773.16,-511.81 878.5,-511.81 R58y.2@880.31,-510 R58x.2@880.31,-470.81
NetR59x_2: R59x.2 R59y.2 SIG2.29 | length 171.4
  Bottom Layer w6: SIG2.29@300.72,-433.07 430.86,-433.07 R59y.2@432.31,-431.61 R59x.2@432.31,-392.42
NetR60x_2: R60x.2 R60y.2 SIG2.31 | length 171.5
  Bottom Layer w6: SIG2.31@300.72,-511.81 430.5,-511.81 R60y.2@432.31,-510 R60x.2@432.31,-470.81
NetR61x_2: R61x.2 R61y.2 SIG3.29 | length 170.8
  Bottom Layer w6: SIG3.29@-171.72,-433.07 -42.14,-433.07 R61y.2@-40.68,-431.61 R61x.2@-40.68,-392.42
NetR62x_2: R62x.2 R62y.2 SIG3.31 | length 171
  Bottom Layer w6: SIG3.31@-171.72,-511.81 -42.5,-511.81 R62y.2@-40.68,-510 R62x.2@-40.68,-470.81
NetR63x_2: R63x.2 R63y.2 SIG4.29 | length 169.3
  Bottom Layer w6: SIG4.29@-644.16,-433.07 -516.14,-433.07 R63y.2@-514.69,-431.61 R63x.2@-514.69,-392.42
NetR64x_2: R64x.2 R64y.2 SIG4.31 | length 166.9
  Bottom Layer w6: SIG4.31@-644.16,-511.81 R64y.2@-516.5,-511.81 ; R64y.2@-514.69,-510 R64x.2@-514.69,-470.81
NetRDYN_1: RDYN.1 SIGY.4 | length 379.3
  Top Layer w6: SIGY.4@0,-920 0,-875 25,-850 133,-850 202,-781 RDYN.1@202,-687.68
NetRXA_1: RXA.1 SIGX.1 | length 157.6
  Top Layer w6: RXA.1@-449.32,940 -320,940 SIGX.1@-300,920
NetRXB_1: RXB.1 SIGX.7 | length 134.1
  Top Layer w6: SIGX.7@300,920 414.31,920 RXB.1@428.32,934
NetRYA_1: RYA.1 SIGY.7 | length 172.7
  Top Layer w6: SIGY.7@300,-920 301,-919 RYA.1@472.32,-919
NetRYB_1: RYB.1 SIGY.1 | length 126.3
  Top Layer w6: RYB.1@-427.32,-919 SIGY.1@-301,-919
pads on no net: SIG1.33 SIG2.34 SIG3.35

## Polygon pours and split planes (outlines as drawn)
GND on Pot_Gnd "gnd_pot" (solid, remove dead copper, pour order 6): -965,965 -965,-966 965,-966 965,965 -965,965
GND on X "gnd_X" (solid, remove dead copper, pour order 5): -965,965 -965,-966 965,-966 965,965 -965,965
GND on Y "gnd_Y" (solid, remove dead copper, pour order 4): -965,965 -965,-966 965,-966 965,965 -965,965
GND on Ground (split plane): 1015.56,-1015.56 -1015.56,-1015.56 -1015.56,1015.56 1015.56,1015.56

## Keep-outs
Keep-Out Layer:
  the board outline again, w7.87